# Altium PCB FE2.1_PCB.PcbDoc
Units mil, origin at the board's own origin, x right, y up, seen from the top; angles counter-clockwise.
Board outline not stored, 2 copper layers (Top Layer, Bottom Layer); 19 components, 0 nets, 86 pads, 0 vias.
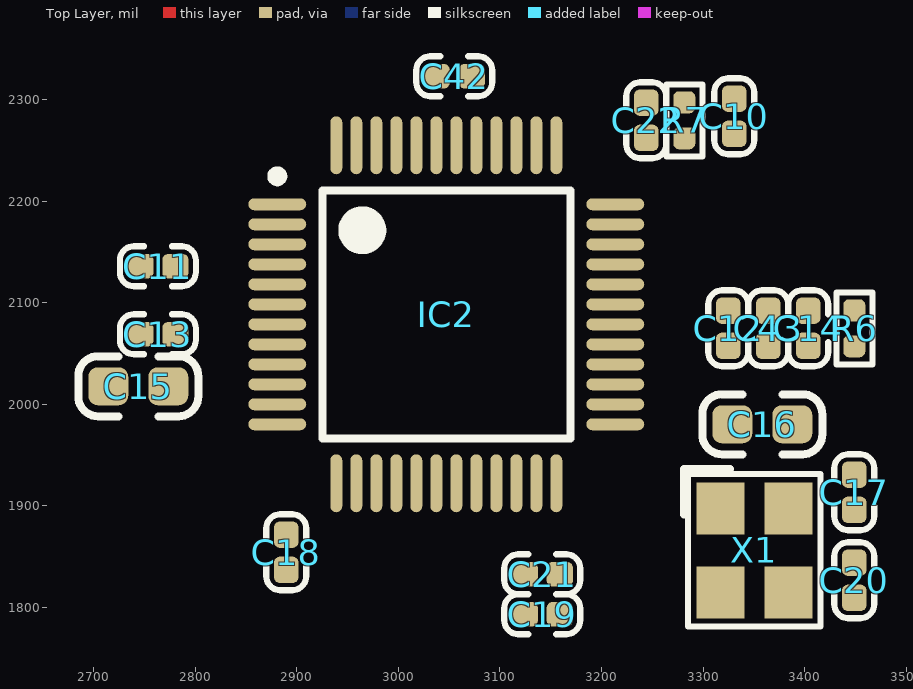
[diagram p0: Top Layer view]
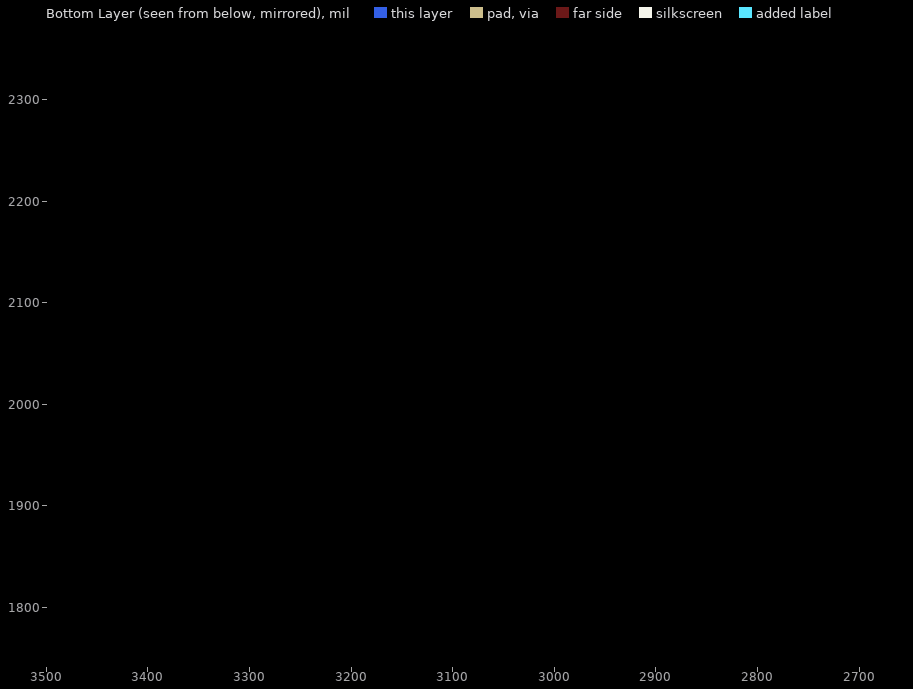
[diagram p1: Bottom Layer view, seen from below]

## Layer stack, top to bottom
Top Solder: solder mask 0.4, Solder Resist, Dk 3.5
Top Layer: signal copper 1.4
Dielectric 1: dielectric 12.6, FR-4, Dk 4.8
Bottom Layer: signal copper 1.4
Bottom Solder: solder mask 0.4, Solder Resist, Dk 3.5

## Components (designator, comment, footprint, x,y, rotation, side; value= is the part's Value field where it differs from the comment)
C10 "100nF" C_0402 3330.71,2283.46 r90 top
C11 "100nF" C_0402 2763.39,2135.83 r0 top
C12 "100nF" C_0402 3324.8,2074.8 r270 top
C13 "100nF" C_0402 2763.39,2068.9 r180 top
C14 "100nF" C_0402 3403.54,2074.8 r270 top
C15 "10uF" C_0603 2744.09,2017.72 r0 top
C16 "10uF" C_0603 3358.27,1980.32 r0 top
C17 "20pF" C_0402 3448.82,1913.39 r270 top
C18 "100nF" C_0402 2889.76,1854.33 r270 top
C19 "100nF" C_0402 3141.73,1793.31 r0 top
C20 "20pF" C_0402 3448.82,1826.77 r270 top
C21 "100nF" C_0402 3141.73,1832.68 r0 top
C22 "1uF" C_0402 3244.09,2279.53 r270 top
C42 "100nF" C_0402 3055.12,2322.83 r0 top
C43 "100nF" C_0402 3364.17,2074.8 r270 top
IC2 "FE2.1" LQFP48-48_7X7 3047.24,2088.58 r270 top locked
R6 "2.7kΩ" R_0402 3448.82,2074.8 r270 top
R7 "10kΩ" R_0402 3281.5,2279.53 r90 top
X1 "12Mhz/20pF" XTAL_3225-4P 3350.39,1856.3 r270 top

## Footprints (in the part's own frame and the unit in brackets; to place one, negate y for a bottom-side part, rotate by r counter-clockwise, add the part's x,y. Pads: shape width x height; smd on the part's side, far side on the other; paste and mask are expansions set on the pad)
C_0402 [mm] "Chip Capacitor, 2-Leads, Body 1.00x0.50mm, IPC Medium Density"
  rrect50% 0.66x0.62 smd: 1(-0.44,0) 2(0.44,0)
  silkscreen extent -0.95,-0.5 0.95,0.5, body extent -0.52,-0.27 0.53,0.28, height 0.55
C_0603 [mm] "Chip Capacitor, 2-Leads, Body 1.60x0.80mm, IPC Medium Density"
  rrect50% 1x0.95 smd: 1(-0.75,0) 2(0.75,0)
  silkscreen extent -1.5,-0.75 1.5,0.75, body extent -0.8,-0.4 0.8,0.4, height 0.87
LQFP48-48_7X7 [mm] "TSQFP, 48-Leads, Body 7.00x7.00mm, Pitch 0.50mm, IPC Medium Density"
  oval 0.3x1.45 smd: 1(-2.75,-4.225) 2(-2.25,-4.225) 3(-1.75,-4.225) 4(-1.25,-4.225) 5(-0.75,-4.225) 6(-0.25,-4.225) 7(0.25,-4.225) 8(0.75,-4.225) 9(1.25,-4.225) 10(1.75,-4.225) 11(2.25,-4.225) 12(2.75,-4.225) 25(2.75,4.225) 26(2.25,4.225) 27(1.75,4.225) 28(1.25,4.225) 29(0.75,4.225) 30(0.25,4.225) 31(-0.25,4.225) 32(-0.75,4.225) 33(-1.25,4.225) 34(-1.75,4.225) 35(-2.25,4.225) 36(-2.75,4.225)
  oval 1.45x0.3 smd: 13(4.225,-2.75) 14(4.225,-2.25) 15(4.225,-1.75) 16(4.225,-1.25) 17(4.225,-0.75) 18(4.225,-0.25) 19(4.225,0.25) 20(4.225,0.75) 21(4.225,1.25) 22(4.225,1.75) 23(4.225,2.25) 24(4.225,2.75) 37(-4.225,2.75) 38(-4.225,2.25) 39(-4.225,1.75) 40(-4.225,1.25) 41(-4.225,0.75) 42(-4.225,0.25) 43(-4.225,-0.25) 44(-4.225,-0.75) 45(-4.225,-1.25) 46(-4.225,-1.75) 47(-4.225,-2.25) 48(-4.225,-2.75)
  silkscreen extent -3.57,-4.35 3.1,3.1, body extent -4.5,-4.51 4.5,4.5, height 1.45
R_0402 [mm] "Chip Resistor, 2-Leads, Body 1.00x0.50mm, IPC Medium Density"
  rrect50% 0.55x0.55 smd: 1(-0.45,0) 2(0.45,0)
  silkscreen extent -0.9,-0.45 0.9,0.45, body extent -0.5,-0.27 0.5,0.28, height 0.4
XTAL_3225-4P [mm]
  rect 1.3x1.2 smd: 1(-1.05,-0.85) 2(1.05,-0.85) 3(1.05,0.85) 4(-1.05,0.85)
  silkscreen extent -2.03,-1.75 1.91,1.65, body extent -1.47,-1.27 1.73,1.23, height 0.7

## Part data
C10 C11 C12 C13 C14 C15 C16 C17 C18 C19 C20 C21 C22 C42 C43: library part Cap_Chip, "贴片电容"
IC2: library part FE2.1_QFP, "USB2.0 Hub 芯片", LCSC=C39693, Manufacturer_Name="Terminus Technology", Manufacturer_Part_Number=FE2.1_QFP
R6 R7: library part Res_Chip, "贴片电阻"
X1: library part Crystal_4P, "4脚无源晶振", LCSC=C9002, Manufacturer_Name=YXC(扬兴科技), Manufacturer_Part_Number=X322512MSB4SI

## Nets (pads, with @x,y where several pads share a name; then routed paths per layer and width w, separated by ;. In a path a pad name is that pad's centre, name@x,y a point inside that pad or via, vN(x,y) a via of type N, cw(c..) or ccw(c..) an arc to the next point about the centre after c; other vN are vias at no path point)
pads on no net: C10.1 C10.2 C11.1 C11.2 C12.1 C12.2 C13.1 C13.2 C14.1 C14.2 C15.1 C15.2 C16.1 C16.2 C17.1 C17.2 C18.1 C18.2 C19.1 C19.2 C20.1 C20.2 C21.1 C21.2 C22.1 C22.2 C42.1 C42.2 C43.1 C43.2 IC2.1 IC2.2 IC2.3 IC2.4 IC2.5 IC2.6 IC2.7 IC2.8 IC2.9 IC2.10 IC2.11 IC2.12 IC2.13 IC2.14 IC2.15 IC2.16 IC2.17 IC2.18 IC2.19 IC2.20 IC2.21 IC2.22 IC2.23 IC2.24 IC2.25 IC2.26 IC2.27 IC2.28 IC2.29 IC2.30 IC2.31 IC2.32 IC2.33 IC2.34 IC2.35 IC2.36 IC2.37 IC2.38 IC2.39 IC2.40 IC2.41 IC2.42 IC2.43 IC2.44 IC2.45 IC2.46 IC2.47 IC2.48 R6.1 R6.2 R7.1 R7.2 X1.1 X1.2 X1.3 X1.4